# EAGLE board operator_mk3_build_03062015_rev10_dirtyPCB (EAGLE 7.1.0)
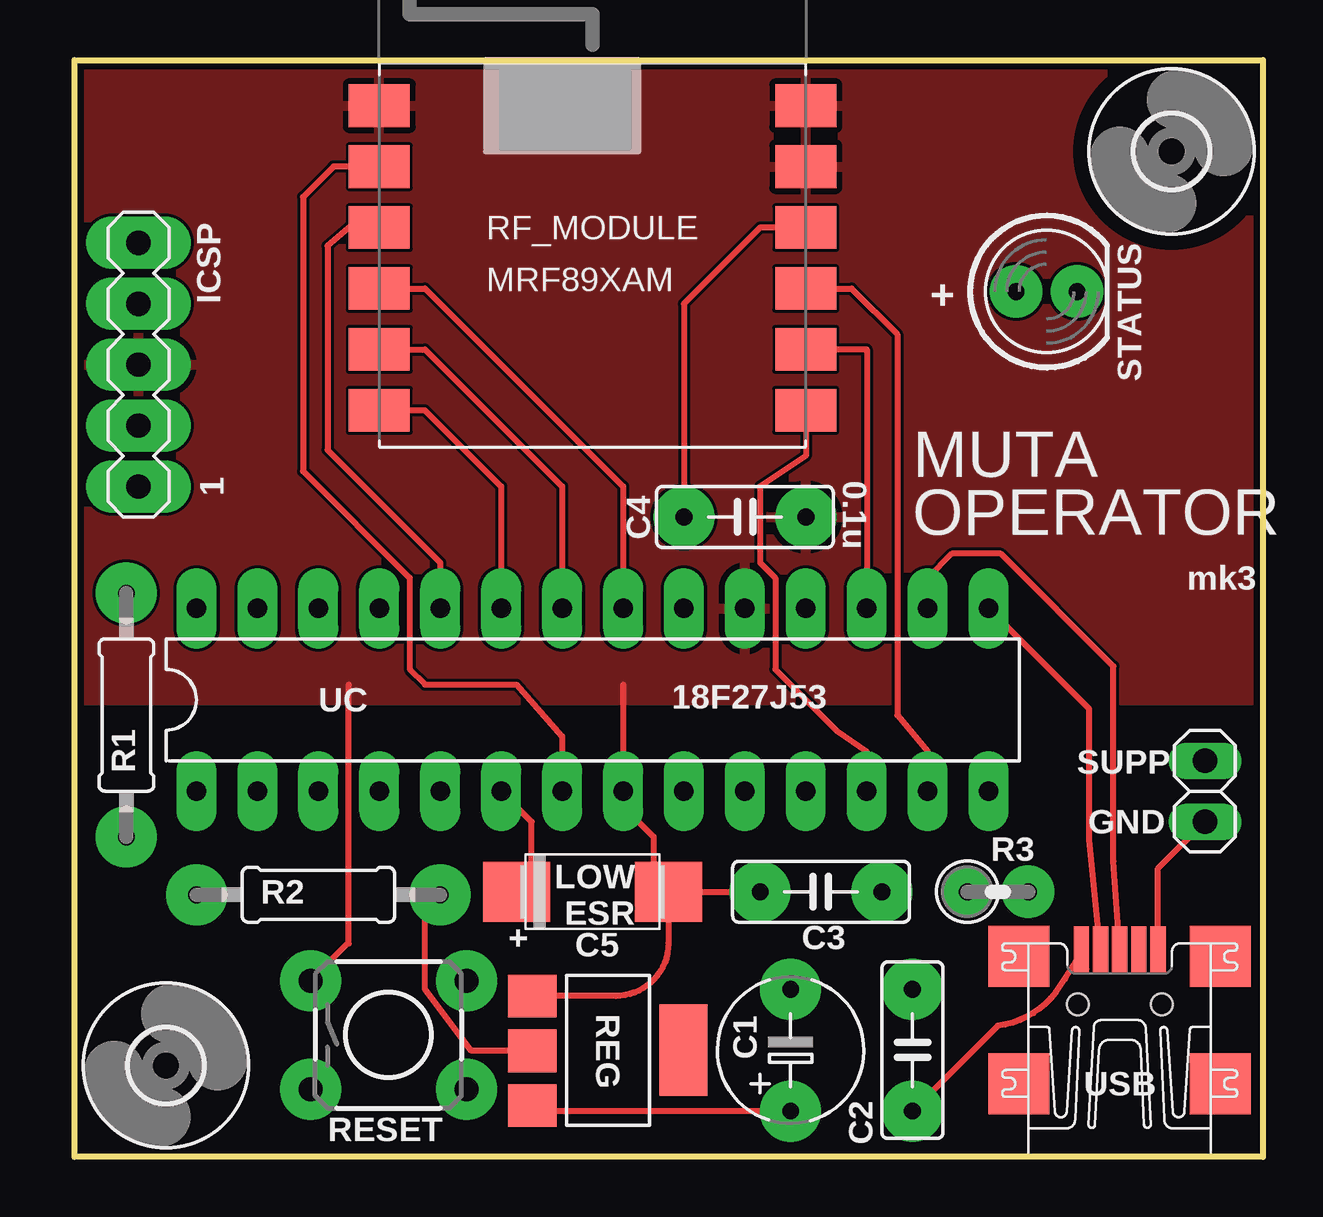
[diagram p0: board, top side]
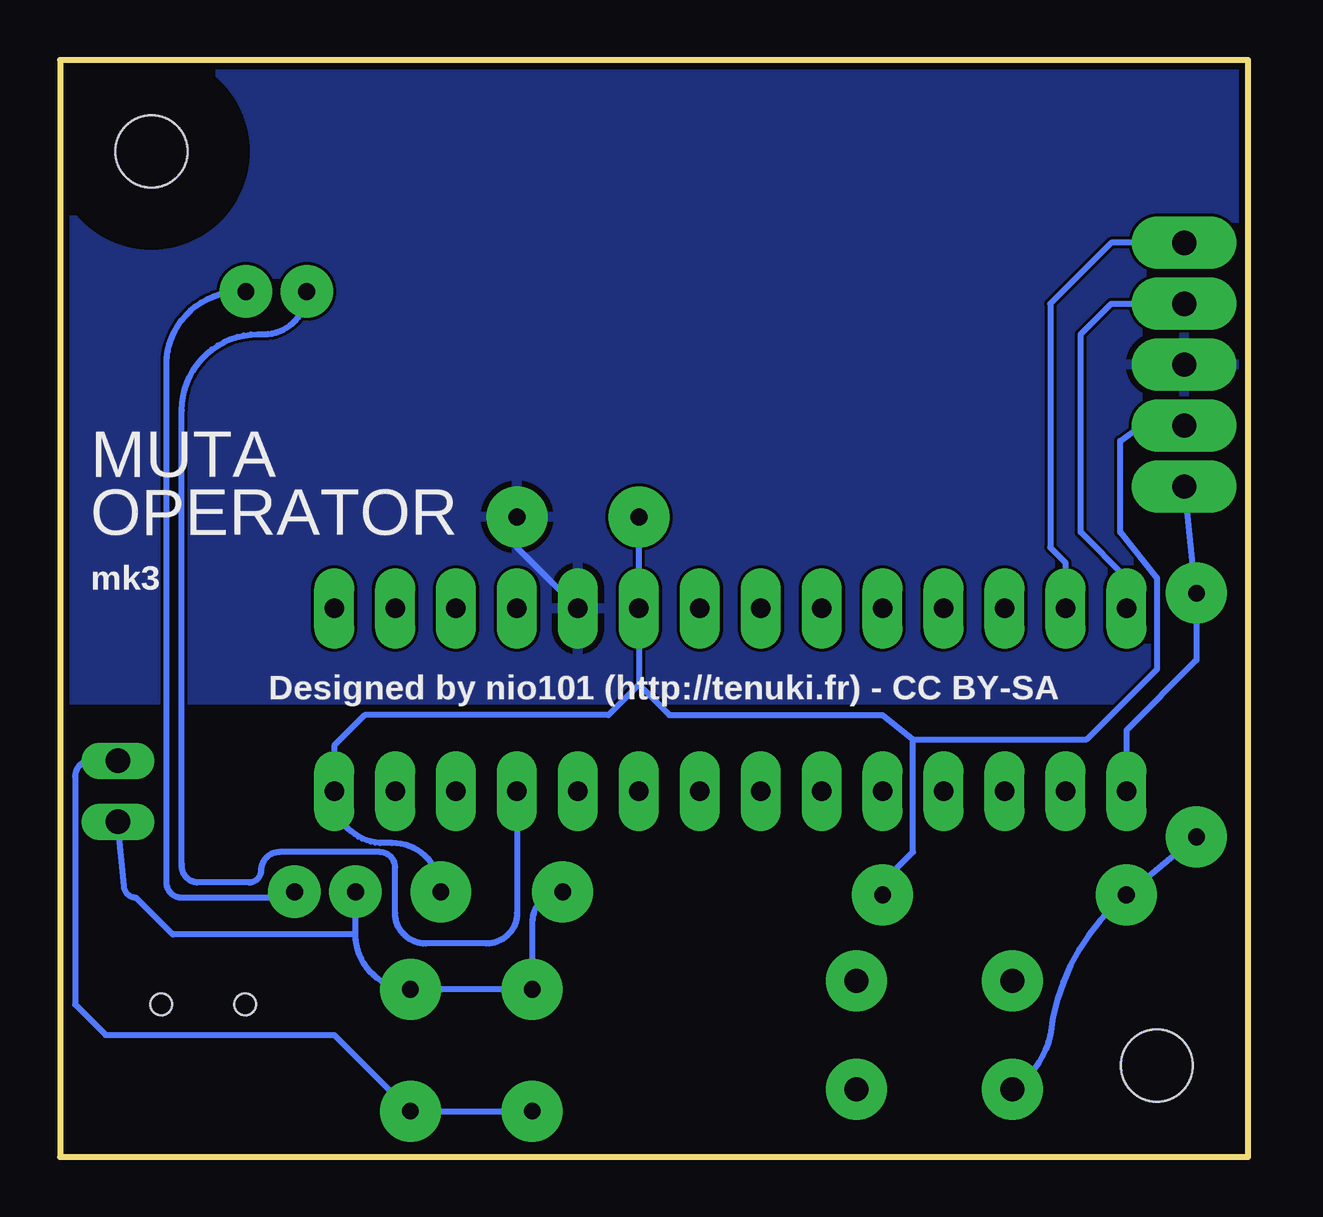
[diagram p1: board, bottom side, seen from below]

Size 49.53 x 45.72 mm. Coordinates in mm from the lower left corner, seen from the top.
Outline: 0,0 0,45.72 49.53,45.72 49.53,0 0,0
Copper layers (1*16): Top 0.035mm / dielectric 1.5mm / Bottom 0.035mm
Design rules "dirt_cheap_dirty_boards.v1": minimum track width 5mil, minimum drill 12mil, track to track 5mil, track to pad 5mil, pad to pad 5mil, via to via 5mil, smd to smd 0mil, copper to edge 10mil, drill to drill 10mil, minimum pad ring 10mil, minimum via ring 6mil, stop-mask expansion 2mil, vias tented up to drill 25mil, thermal gap 10mil

## Footprints (pad centres in the part's own frame; a part is rotated, then mirrored left to right if it is on the bottom)
TT5D6 = drill 0.7 pad 2.54: + -2.54,0; - 2.54,0
C050-025X075 = drill 0.7 pad 2.54: 1 -2.54,0; 2 2.54,0
C/6032-28R = smd 2.794 x 2.5: + 3.16,0; - -3.16,0
MA05-1 = drill 1.016 pad 2.184 long: 1 -5.08,0; 2 -2.54,0; 3 0,0; 4 2.54,0; 5 5.08,0
0207/10 = drill 0.7 pad 2.54: 1 -5.08,0; 2 5.08,0
0207/2V = drill 0.7 pad 2.184: 1 -1.27,0; 2 1.27,0
SOT223 = smd 1.778 x 2.032: 1 -2.261,-3.15; 2 0.025,-3.15; 3 2.311,-3.15 | smd 3.81 x 2.007: 4 0,3.15
TACTILE-PTH = drill 1 pad 2.54: 1 -3.251,2.261; 2 3.251,2.261; 3 -3.251,-2.261; 4 3.251,-2.261
MRF89XAMXA = smd 2.54 x 1.778: 1 -8.89,-1.27; 2 -8.89,-3.81; 3 -8.89,-6.35; 4 -8.89,-8.89; 5 -8.89,-11.43; 6 -8.89,-13.97; 7 8.89,-13.97; 8 8.89,-11.43; 9 8.89,-8.89; 10 8.89,-6.35; 11 8.89,-3.81; 12 8.89,-1.27
LED5MM = drill 0.7 pad 2.184: A -1.27,0; K 1.27,0
1X02 = drill 1.016 long: 1 -1.27,0; 2 1.27,0
3,0 = hole 3: 0,0
DIL28-3 = drill 0.813 pad 1.676 long: 1 -16.51,-3.81; 2 -13.97,-3.81; 3 -11.43,-3.81; 4 -8.89,-3.81; 5 -6.35,-3.81; 6 -3.81,-3.81; 7 -1.27,-3.81; 8 1.27,-3.81; 9 3.81,-3.81; 10 6.35,-3.81; 11 8.89,-3.81; 12 11.43,-3.81; 13 13.97,-3.81; 14 16.51,-3.81; 15 16.51,3.81; 16 13.97,3.81; 17 11.43,3.81; 18 8.89,3.81; 19 6.35,3.81; 20 3.81,3.81; 21 1.27,3.81; 22 -1.27,3.81; 23 -3.81,3.81; 24 -6.35,3.81; 25 -8.89,3.81; 26 -11.43,3.81; 27 -13.97,3.81; 28 -16.51,3.81
UX60-MB-5ST = smd 2 x 0.635: 1 2.25,1.6; 2 2.25,0.8; 3 2.25,0; 4 2.25,-0.8; 5 2.25,-1.6 | smd 2.54 x 2.54: M1 -3.3,-4.2; M2 -3.3,4.2; M3 2,4.2; M4 2,-4.2 | hole 0.9: 0,-1.75; 0,1.75

## Placement (x,y rotation side)
C1  10uF  [TT5D6]  29.84,4.45 90 top
C2  0.1uF  [C050-025X075]  34.92,4.45 90 top
C3  0.1uF  [C050-025X075]  31.11,11.05 180 top
C4  0.1uF  [C050-025X075]  27.94,26.67 0 top
C5  10uF  [C/6032-28R]  21.59,11.05 180 top
ICSP  [MA05-1]  2.67,33.02 90 top
R1  100  [0207/10]  2.16,18.41 90 top
R2  10k  [0207/10]  10.16,10.92 0 top
R3  10k  [0207/2V]  38.48,11.05 0 top
REG  LD33  [SOT223]  22.23,4.45 270 top
RESET  SWITCH-MOMENTARY-2PTH  [TACTILE-PTH]  13.08,5.08 0 top
RF_MODULE  MRF89XAM8A  [MRF89XAMXA]  21.59,45.09 0 top
STATUS  [LED5MM]  40.51,36.07 0 top
SUPP  [1X02]  47.12,15.24 270 top
U$1  [3,0]  45.72,41.91 180 top
U$4  [3,0]  3.81,3.81 0 top
UC  PIC18F27J53SP  [DIL28-3]  21.59,19.05 0 top
USB  mini_usb_connector  [UX60-MB-5ST]  43.56,6.35 90 top

## Library data of the parts
C1 C5 = resistor
C2-C4 = rcl
ICSP = con-lstb; OC_FARNELL: unknown; OC_NEWARK: unknown
R1-R3 = resistor; SPICEPREFIX: R
REG = burr-brown; MPN: LD33; OC_FARNELL: 1097566; OC_NEWARK: 14P6981
RESET = SparkFun-Electromechanical
RF_MODULE = microchip2
STATUS = SparkFun-LED
SUPP = pinhead
U$1 U$4 = holes
UC = microchip; MPN: PIC18F27J53-I/SP; OC_FARNELL: unknown; OC_NEWARK: 63R7839
USB = con-hirose; OC_FARNELL: unknown; OC_NEWARK: unknown

## Nets
5V: C1.+ C2.1 REG.3 SUPP.1 USB.1
GND: C1.- C2.2 C3.2 C4.2 C5.- ICSP.3 R3.1 REG.1 RESET.1 RF_MODULE.1 RF_MODULE.11 RF_MODULE.12 SUPP.2 UC.8 UC.19 USB.5
N$1: UC.15 USB.2
N$2: UC.16 USB.3
N$3: ICSP.1 R1.2 UC.1
N$4: C5.+ UC.6
N$5: R1.1 R2.1 RESET.3
N$6: ICSP.4 UC.28
N$7: ICSP.5 UC.27
N$9: RF_MODULE.2 UC.7
N$10: RF_MODULE.6 UC.23
N$14: R3.2 STATUS.K
N$15: STATUS.A UC.11
N$19: RF_MODULE.7 UC.12
N$21: RF_MODULE.3 UC.24
N$22: RF_MODULE.5 UC.22
N$23: RF_MODULE.4 UC.21
N$24: RF_MODULE.9 UC.13
N$25: RF_MODULE.8 UC.17
VCC: C3.1 C4.1 ICSP.2 R2.2 REG.2 RF_MODULE.10 UC.14 UC.20

## Tracks (layer width: path | path; a pad name or v marks a point on that pad's centre or on a via)
5V
  Top 0.254: C1.+ 19.3,1.91 REG.3 | 42.16,7.79 USB.1 arc-11 40.89,6.86 arc-46 38.48,5.46 C2.1
  Bottom 0.254: C1.+ C2.1 38.1,5.08 47.62,5.08 48.9,6.35 48.9,15.88 arc90 48.26,16.51 SUPP.1
GND
  Top 0.254: C5.- 24.13,11.67 24.13,13.34 22.86,14.61 UC.8 22.86,19.68 | C5.- 24.75,8.9 | 24.75,8.9 24.77,8.89 | 24.75,8.9 arc-90 22.55,6.71 REG.1 | 11.43,19.68 11.43,8.89 11.38,8.89 RESET.1 | C5.- C3.2 | USB.5 45.16,12.01 SUPP.2
  Bottom 0.254: C4.2 30.48,25.4 UC.19 | C3.2 arc-90 29.84,9.78 C1.- C2.2 arc90 37.21,9.27 | 37.21,9.27 R3.1 | SUPP.2 46.86,11.3 arc-90 46.35,10.79 44.83,9.27 37.21,9.27
  pour Bottom (isolate 0.025): -0.89,46.1 -0.89,19.05 50.16,19.05 50.16,46.1
  pour Top (isolate 0.025): -0.89,46.1 -0.25,19.05 50.16,19.05 50.16,46.1
N$1
  Top 0.254: USB.2 42.29,13.21 42.29,18.67 UC.15
N$2
  Top 0.254: USB.3 43.31,12.32 43.31,20.45 38.61,25.15 36.58,25.15 35.56,24.13 UC.16
N$3
  Bottom 0.254: ICSP.1 2.29,24.26 R1.2 2.16,20.7 5.08,17.78 UC.1
N$4
  Top 0.254: C5.+ 19.05,11.67 19.05,13.97 UC.6
N$5
  Bottom 0.254: R1.1 R2.1 arc-44 8.26,5.08 arc44 RESET.3
N$6
  Bottom 0.254: UC.28 5.08,24.13 6.99,26.04 6.99,34.29 5.71,35.56 ICSP.4
N$7
  Bottom 0.254: ICSP.5 5.71,38.1 8.26,35.56 8.26,25.4 7.62,24.77 UC.27
N$9
  Top 0.254: RF_MODULE.2 10.79,41.27 9.53,40.01 9.53,28.57 13.97,24.13 13.97,20.32 14.61,19.68 18.41,19.68 20.32,17.53 UC.7
N$10
  Top 0.254: RF_MODULE.6 14.61,31.11 17.78,27.94 UC.23
N$14
  Bottom 0.254: R3.2 arc90 40.01,10.79 44.45,10.79 arc90 45.09,11.43 45.09,33.02 arc90 42.04,36.07 STATUS.K
N$15
  Bottom 0.254: UC.11 30.48,10.16 arc90 31.75,8.89 34.29,8.89 arc90 35.56,10.16 35.56,12.06 arc-90 36.2,12.7 40.39,12.7 arc-90 41.15,11.94 arc90 41.66,11.43 43.81,11.43 arc90 44.45,12.19 44.45,31.11 arc90 41.27,34.29 41.02,34.29 arc-90 STATUS.A
N$19
  Top 0.254: RF_MODULE.7 30.48,29.21 28.57,27.94 28.57,24.77 29.21,24.13 29.21,20.32 31.75,17.78 33.02,16.89 UC.12
N$21
  Top 0.254: RF_MODULE.3 11.43,38.73 10.54,37.97 10.54,29.46 15.24,24.77 UC.24
N$22
  Top 0.254: RF_MODULE.5 14.61,33.66 20.32,27.94 UC.22
N$23
  Top 0.254: RF_MODULE.4 14.61,36.2 22.86,27.94 UC.21
N$24
  Top 0.254: RF_MODULE.9 32.38,36.2 34.29,34.29 34.29,18.41 35.56,16.89 UC.13
N$25
  Top 0.254: RF_MODULE.8 33.02,33.66 UC.17
VCC
  Top 0.254: RF_MODULE.10 28.57,38.73 25.4,35.56 C4.1 | REG.2 16.54,4.42 14.61,6.99 14.61,10.29 R2.2
  Bottom 0.254: C4.1 UC.20 25.4,19.68 | 25.4,19.68 26.67,18.41 36.83,18.41 38.1,17.14 UC.14 arc-90 36.2,13.08 35.69,13.08 arc90 C3.1 | 25.4,19.68 24.13,18.41 15.24,18.41 13.97,17.4 | 13.97,17.4 6.73,17.4 3.81,20.32 3.81,24.13 5.33,26.04 5.33,29.84 4.45,30.48 ICSP.2 | R2.2 15.24,11.43 13.97,12.7 13.97,17.4

## Text on the board
tNames: MRF89XAM | + | 1 | 0.1u | MUTA | OPERATOR | mk3 | 18F27J53 | GND | LOW / ESR | +
bNames: MUTA | OPERATOR | mk3 | Designed by nio101 (http://tenuki.fr) - CC BY-SA